# Altium PCB SB2232_v02.PcbDoc
Units mm, origin at the board's own origin, x right, y up, seen from the top; angles counter-clockwise.
Board outline 70 x 25 mm, 2 copper layers (Top Layer, Bottom Layer); 51 components, 50 nets, 185 pads, 116 vias.
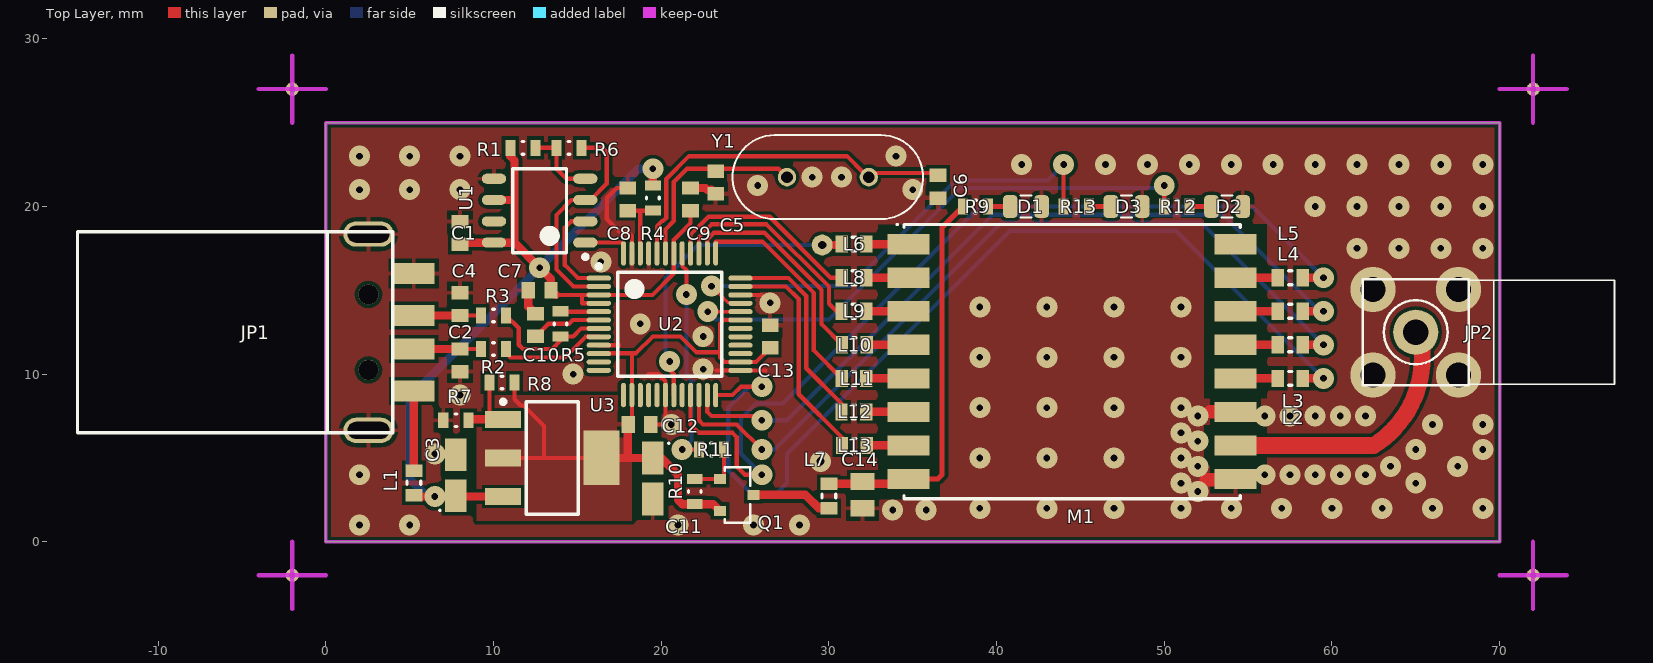
[diagram p0: Top Layer view]
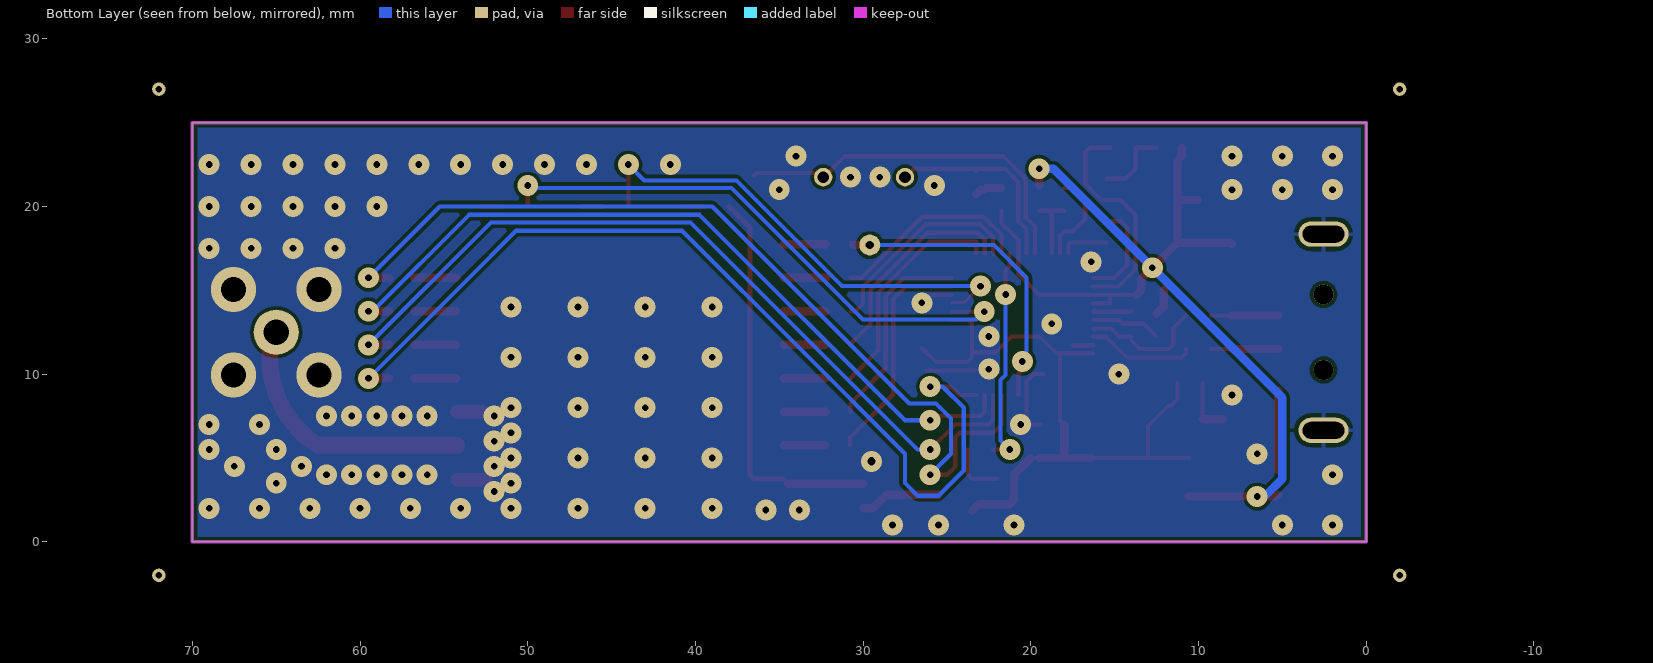
[diagram p1: Bottom Layer view, seen from below]

## Layer stack, top to bottom
Top Solder: solder mask 0.0102, Solder Resist, Dk 3.5
Top Layer: signal copper 0.0356
Dielectric 1: dielectric 0.32, FR-4, Dk 4.8
Bottom Layer: signal copper 0.0356
Bottom Solder: solder mask 0.0102, Solder Resist, Dk 3.5

## Board outline
0,0 0,25 70,25 70,0

## Design rules (kind name [scope] priority, off if disabled: settings)
Clearance Clearance_1 [InNamedPolygon('GND-T1') vs InComponent('M1')] p1: gap=0.6 ignorepadtopadclearanceinfootprint=FALSE
Clearance [All] p2: gap=0.2 ignorepadtopadclearanceinfootprint=FALSE
PolygonConnect PolygonConnect_3 [InComponent('JP2') vs IsNamedPolygon('GND-T1') Or  IsNamedPolygon('GND-B1')] p1: connectstyle=Direct reliefconductorwidth=0.254 reliefentries=4 polygonreliefangle="90 Angle" airgapwidth=0.254
PolygonConnect PolygonConnect_2 [IsVia vs IsNamedPolygon('GND-T1') Or  IsNamedPolygon('GND-B1')] p2: connectstyle=Direct reliefconductorwidth=0.254 reliefentries=4 polygonreliefangle="90 Angle" airgapwidth=0.254
PolygonConnect PolygonConnect_1 [InComponent('U3') vs IsNamedPolygon('3V3_T')] p3: thpad.connectstyle=Direct thpad.reliefconductorwidth=0.254 thpad.reliefentries=4 thpad.polygonreliefangle="90 Angle" thpad.airgapwidth=0.254 smdpad.connectstyle=Direct smdpad.reliefconductorwidth=0.254 smdpad.reliefentries=4 smdpad.polygonreliefangle="90 Angle" smdpad.airgapwidth=0.254 via.connectstyle=Relief via.reliefconductorwidth=0.254 via.reliefentries=4 via.polygonreliefangle="90 Angle" via.airgapwidth=0.254
PolygonConnect [All] p4: connectstyle=Relief reliefconductorwidth=0.254 reliefentries=4 polygonreliefangle="90 Angle" airgapwidth=0.254
RoutingVias [All] p1: holewidth=0.4 width=0.8 viastyle="Through Hole" minholewidth=0.711 minwidth=1.27 maxholewidth=0.711 maxwidth=1.27
SolderMaskExpansion [All] p1: expansion=0.102
Width [All] p1: maxlimit=3 minlimit=0.2 preferedwidth=0.2
30 further rules are at their usual default settings.

## Components (designator, comment, footprint, x,y, rotation, side; value= is the part's Value field where it differs from the comment)
C1 "100n" CAPC1608X08N 8,18.425 r90 top
C2 "47p" CAPC1608X08N 8,10.825 r270 top
C3 "10u 16V" CAPMP3217X18N 7.75,3.975 r90 top
C4 "47p" CAPC1608X08N 8,14.175 r90 top
C5 "47p" CAPC1608X08N 23.25,21.425 r90 top
C6 "47p" CAPC1608X08N 36.5,21.175 r90 top
C7 "100n" CAPC1608X08N 12.75,15 r180 top
C8 "100n" CAPC1608X08N 18,20.425 r90 top
C9 "100n" CAPC1608X08N 21.75,20.425 r90 top
C10 "47n" CAPC1608X08N 12.5,12.925 r270 top
C11 "10u 16V" CAPMP3217X18N 19.5,3.775 r270 top
C12 "100n" CAPC1608X08N 18.7,7 r0 top
C13 "100n" CAPC1608X08N 26.5,12.25 r90 top
C14 "10uF" CAPC2012X11N 32,2.8 r270 top
D1 "LED" LEDC200X125X80L40N 41.75,20 r180 top
D2 "LED" LEDC200X125X80L40N 53.75,20 r180 top
D3 "LED" LEDC200X125X80L40N 47.75,20 r180 top
JP1 "USBA-1M" USB_A_M_SMD 5.24,12.5 r90 top locked
JP2 "S-037" S-037_3D 65,12.5 r0 top
L1 "BLM18AG601" INDC1608X10N 5.25,3.515 r270 top
L2 "BLM18AG601" INDC1608X10N 57.515,9.75 r180 top
L3 "BLM18AG601" INDC1608X10N 57.515,11.75 r180 top
L4 "BLM18AG601" INDC1608X10N 57.515,13.75 r180 top
L5 "BLM18AG601" INDC1608X10N 57.515,15.75 r180 top
L6 "BLM18AG601" INDC1608X10N 31.5,17.75 r0 top
L7 "BLM18AG601" INDC1608X10N 30,2.735 r90 top
L8 "BLM18AG601" INDC1608X10N 31.5,15.75 r180 top
L9 "BLM18AG601" INDC1608X10N 31.485,13.75 r180 top
L10 "BLM18AG601" INDC1608X10N 31.515,11.75 r180 top
L11 "BLM18AG601" INDC1608X10N 31.5,9.75 r180 top
L12 "BLM18AG601" INDC1608X10N 31.485,7.75 r180 top
L13 "BLM18AG601" INDC1608X10N 31.515,5.75 r180 top
M1 "RFM69HW" LGA16_RFM69 44.5,10.75 r0 top locked
Q1 "IRLML6401" SOT-23 23.5,3.75 r270 top
R1 "10k" RESC1608X06N 11.75,23.5 r180 top
R2 "27" RESC1608X06N 10,11.5 r0 top
R3 "27" RESC1608X06N 10,13.5 r0 top
R4 "470" RESC1608X06N 19.5,20.5 r270 top
R5 "1k5" RESC1608X06N 14,13 r270 top
R6 "2k2" RESC1608X06N 14.5,23.5 r0 top
R7 "0" RESC1608X06N 7.75,7.25 r0 top
R8 "nc" RESC1608X06N 10.5,9.5 r0 top
R9 "1k" RESC1608X06N 38.75,20 r0 top
R10 "10k" RESC1608X06N 22,3 r270 top
R11 "1k" RESC1608X06N 23,5.5 r0 top
R12 "1k" RESC1608X06N 50.75,20 r0 top
R13 "1k" RESC1608X06N 44.75,20 r180 top
U1 "93LC46B" SOIC127P600X175-8N 12.75,19.75 r180 top
U2 "FT2232D" TSQFP50P900X900X160-48N 20.5,12.975 r0 top
U3 "LD1117-3.3" SOT230P700X180-4N 13.5,5 r0 top
Y1 "6MHz" XTAL_HC49P488W45L1117T490H350 29.94,21.75 r180 top

## Footprints (in the part's own frame and the unit in brackets; to place one, negate y for a bottom-side part, rotate by r counter-clockwise, add the part's x,y. Pads: shape width x height; smd on the part's side, far side on the other; paste and mask are expansions set on the pad)
CAPC1608X08N [mm] "Chip Capacitor, 2-Leads, Body 1,60x0,80mm, IPC Medium Density"
  rect 0.8x1 smd: 1(-0.675,0) 2(0.675,0)
  body extent -0.87,-0.48 0.87,0.47, height 0.85
CAPC2012X11N [mm] "Chip Capacitor, 2-Leads, Body 2,00x1,25mm, IPC Medium Density"
  rect 1x1.45 smd: 1(-0.8,0) 2(0.8,0)
  body extent -1.1,-0.72 1.1,0.72, height 1.1
CAPMP3217X18N [mm] "Molded Capacitor, 2-Leads, Body 3,20x1,65mm, IPC Medium Density"
  rect 1.95x1.3 smd: 1(1.225,0) 2(-1.225,0)
  silkscreen extent -2.15,0.9 -2.05,1, body extent -1.7,-0.9 1.7,0.9, height 1.8
INDC1608X10N [mm] "Chip Inductor, 2-Leads, Body 1,60x0,80mm, IPC Medium Density"
  rect 0.74x1.02 smd: 1(-0.735,0) 2(0.735,0)
  silkscreen extent -0.1,-0.41 0.1,0.41, body extent -0.9,-0.5 0.9,0.5, height 1
LEDC200X125X80L40N [mm] "LED, Chip; 2.00 mm L X 1.25 mm W X 0.80 mm H body"
  rrect51% 0.86x1.35 smd: A(0.935,0) K(-0.935,0)
  silkscreen extent -0.33,-0.65 0.33,0.65, body extent -1,-0.63 1,0.63, height 0.25
LGA16_RFM69 [mm] "LGA, 16-Leads, RFM69HW"
  rect 2.5x1.2 smd: 1(-9.75,7) 2(-9.75,5) 3(-9.75,3) 4(-9.75,1) 5(-9.75,-1) 6(-9.75,-3) 7(-9.75,-5) 8(-9.75,-7) 9(9.75,-7) 10(9.75,-5) 11(9.75,-3) 12(9.75,-1) 13(9.75,1) 14(9.75,3) 15(9.75,5) 16(9.75,7)
  silkscreen extent -10.47,-8.17 10.02,8.22, body extent -9.87,-8.03 9.87,8.03, height 2
RESC1608X06N [mm] "Chip Resistor, 2-Leads, Body 1,60x0,82mm, IPC Medium Density"
  rect 0.6x0.95 smd: 1(-0.75,0) 2(0.75,0)
  silkscreen extent -0.05,-0.38 0.05,0.38, body extent -0.85,-0.48 0.85,0.48, height 0.6
S-037_3D [mm]
  round 2.7 hole 1.5: 1(0,0) 2(-2.55,-2.55) 2(-2.55,2.55) 2(2.55,-2.55) 2(2.55,2.55)
  silkscreen extent -3.15,-3.15 11.85,3.15, body extent -2.81,-3.4 9.48,2.9, height 11.5
SOIC127P600X175-8N [mm] "SOIC, 8-Leads, Body 4,90x3,90mm, Pitch 1,27mm, IPC Medium Density"
  oval 1.45x0.6 smd: 1(-2.725,1.905) 2(-2.725,0.635) 3(-2.725,-0.635) 4(-2.725,-1.905) 5(2.725,-1.905) 6(2.725,-0.635) 7(2.725,0.635) 8(2.725,1.905)
  silkscreen extent -2.85,-2.5 1.6,2.88, body extent -3,-2.5 3,2.5, height 1.75
SOT230P700X180-4N [mm] "SOT223, 4-Leads, Body 6,50x7,00mm (avg), Pitch 2,30mm, IPC Medium Density"
  rect 2.15x1 smd: 1(-2.925,2.3) 2(-2.925,0) 3(-2.925,-2.3)
  rect 2.15x3.25 smd: 2(2.925,0)
  silkscreen extent -3.05,-3.35 1.55,3.47, body extent -1.85,-3.35 1.85,3.35, height 1.8
SOT-23 [mm]
  rect 0.6x0.7 smd: 1(0,0) 2(0.95,2) 3(1.9,0)
  silkscreen extent -0.7,0.3 2.6,1.8
TSQFP50P900X900X160-48N [mm] "TSQFP, 48-Leads, Body 7,00x7,00mm, Pitch 0,50mm, IPC Medium Density"
  oval 1.45x0.3 smd: 1(-4.225,2.75) 2(-4.225,2.25) 3(-4.225,1.75) 4(-4.225,1.25) 5(-4.225,0.75) 6(-4.225,0.25) 7(-4.225,-0.25) 8(-4.225,-0.75) 9(-4.225,-1.25) 10(-4.225,-1.75) 11(-4.225,-2.25) 12(-4.225,-2.75) 25(4.225,-2.75) 26(4.225,-2.25) 27(4.225,-1.75) 28(4.225,-1.25) 29(4.225,-0.75) 30(4.225,-0.25) 31(4.225,0.25) 32(4.225,0.75) 33(4.225,1.25) 34(4.225,1.75) 35(4.225,2.25) 36(4.225,2.75)
  oval 0.3x1.45 smd: 13(-2.75,-4.225) 14(-2.25,-4.225) 15(-1.75,-4.225) 16(-1.25,-4.225) 17(-0.75,-4.225) 18(-0.25,-4.225) 19(0.25,-4.225) 20(0.75,-4.225) 21(1.25,-4.225) 22(1.75,-4.225) 23(2.25,-4.225) 24(2.75,-4.225) 37(2.75,4.225) 38(2.25,4.225) 39(1.75,4.225) 40(1.25,4.225) 41(0.75,4.225) 42(0.25,4.225) 43(-0.25,4.225) 44(-0.75,4.225) 45(-1.25,4.225) 46(-1.75,4.225) 47(-2.25,4.225) 48(-2.75,4.225)
  silkscreen extent -4.35,-3.1 3.1,3.57, body extent -3.5,-3.5 3.5,3.5, height 1.6
USB_A_M_SMD [mm] "usb male smd mount"
  oval 1.5x3 hole 1 slot 2.5 at 90 deg: 0(-5.85,2.7) 0(5.85,2.7)
  round 1.2 hole 1.2 unplated mask+0: 0(-2.25,2.7) 0(2.25,2.7)
  rect 1.25x2.5 smd: 1(-3.5,0) 2(-1,0) 3(1,0) 4(3.5,0)
  silkscreen extent -6,1.25 6,20.05
XTAL_HC49P488W45L1117T490H350 [mm] "Crystal, HC-49; 4.88 mm C X 0.45 mm W 11.175 mm L X 4.90 mm T X 3.50 mm H body"
  round 1.1 hole 0.7 paste-1.1: 1(-2.44,0) 2(2.44,0)
  silkscreen extent -5.68,-2.5 5.68,2.5, body extent -5.59,-2.45 5.59,2.45, height 3.5

## Part data
C1 C2 C4 C5 C6 C7 C8 C9 C10 C12 C13 C14: library part CAPN, Вид=Конденсатор, Корпус==Footprint
  C1 C7 C8 C9 C12 C13: Тип=100n
  C2 C4 C5 C6: Тип=47p
  C10: Тип=47n
  C14: Тип=10uF
C3 C11: library part CAPP, Вид=Конденсатор, Корпус==Footprint, Тип="10u 16V"
JP1: library part USB_conn, "USB_connector", Вид=Роз'єм, Корпус==Footprint, Тип=USBA-1M
JP2: library part BNC, "RF Connector", Вид=Роз'єм, Корпус==Footprint, Тип=S-037
L1 L2 L3 L4 L5 L6 L7 L8 L9 L10 L11 L12 L13: library part SUPRESOR, Вид="Ferrite bead", Корпус==Footprint, Тип=BLM18AG601
M1: library part RFM69HW_V13_2, Корпус==Footprint, Тип=RFM69HW
Q1: library part MOSF-P, Вид=Транзистор, Корпус==Footprint, Тип=IRLML6401
R1 R2 R3 R4 R5 R6 R7 R8 R9 R10 R11 R12 R13: library part RES, Вид=Резистор, Корпус==Footprint
  R1 R10: Тип=10k
  R2 R3: Тип=27
  R4: Тип=470
  R5: Тип=1k5
  R6: Тип=2k2
  R7: Тип=0
  R8: Тип=nc
  R9 R11 R12 R13: Тип=1k
U1: library part 93C56, "3-wire EEPROM", Вид=Мікросхема, Корпус==Footprint, Тип=93LC46B
U3: library part LM1117_3.3, Вид=Мікросхема, Корпус==Footprint, Тип=LD1117-3.3
Y1: library part Y, Вид=Кварц, Корпус==Footprint, Тип=6MHz
U2: Вид=Мікросхема, Корпус==Footprint, Тип=FT2232D

## Free pads (board coordinates)
  round 1.25 hole 0.5: 2(29.6,17.7)
  round 0.8 hole 0.4: 3(-2,27) 4(72,27) 5(-2,-2) 6(72,-2)

## Via types
v1: diameter 1.25, hole 0.4, Top Layer to Bottom Layer, 115 vias
v2: diameter 1.25, hole 0.5, Top Layer to Bottom Layer, 1 vias

## Nets (pads, with @x,y where several pads share a name; then routed paths per layer and width w, separated by ;. In a path a pad name is that pad's centre, name@x,y a point inside that pad or via, vN(x,y) a via of type N, cw(c..) or ccw(c..) an arc to the next point about the centre after c; other vN are vias at no path point)
+3V3: C11.2 C12.1 C13.1 Q1.3 R8.2 R10.2 U2.10 U2.14 U2.26 U2.31 U3.2 | length 41.6
  Top Layer w0.25: U3.2@10.575,5 13,5 ; R8.2 11.25,8.5 11.625,8.125 11.785,8.125 13,6.91 13,5 ; U2.10 16.3,11.25 18.25,11.25 ; U3.2@16.425,5 13,5 ; C12.1@18,7 18.25,7.25 U2.14 18.25,11.25 ; C11.2 C11.2@20,5 ; U2.31 23.725,13.225 23.5,13 23.5,11.3 ; C13.1 25.65,10.725 U2.26 23.775,10.725 23.5,11 23.5,11.3 ; 18.25,11.25 18.5,11.25 19.5,12.25 21.156,12.25 22.106,11.3 23.5,11.3
  Top Layer w0.5: U3.2@16.425,5 18,5 ; C12.1@18,7 18,5 ; C11.2 18,5 ; C11.2@20,5 21,4 21,2.5 21.25,2.25 R10.2 23.1,2.25 Q1.3
DIO0: L8.2 U2.40 | length 12.1
  Top Layer w0.25: U2.40 21.75,18.321 22.814,19.384 26.473,19.384 30.107,15.75 L8.2
DIO1: L9.2 U2.39 | length 12.5
  Top Layer w0.25: U2.39 22.25,18.184 23,18.934 26.286,18.934 30,15.221 30,14.2 30.45,13.75 L9.2
DIO2: L10.2 U2.38 | length 13
  Top Layer w0.25: U2.38 22.75,18.048 23.136,18.434 26.15,18.434 29.55,15.034 29.55,12.98 L10.2
DIO3: L11.2 U2.37 | length 13.6
  Top Layer w0.25: U2.37 23.25,17.9 26.048,17.9 29.1,14.848 29.1,11.415 L11.2
DIO4: L12.2 U2.36 | length 12.1
  Top Layer w0.25: U2.36 27.586,15.725 28.65,14.661 28.65,10.35 30.75,8.25 L12.2
DIO5: L13.2 U2.35 | length 13.6
  Top Layer w0.25: U2.35 27.45,15.225 28.2,14.475 28.2,8.8 30.78,6.22 L13.2
GND: C1.2 C2.2 C3.1 C4.2 C5.1 C6.1 C7.2 C8.2 C9.2 C10.1 C11.1 C12.2 C13.2 C14.2 D1.K D2.K D3.K JP1.0@2.54,6.65 JP1.0@2.54,18.35 JP1.4 JP2.2 M1.9 M1.11 R7.1 U1.5 U2.9 U2.18 U2.25 U2.34 U2.45 U2.47 | length 22.2
  Top Layer w0.2: 25.975,14.725 26,14.75 ; M1.9@54.2,3.7 M1.9
  Top Layer w0.25: U2.9 17.475,11.725 ; C8.2 17.35,21.1 16.75,20.5 16.75,19.25 17.5,18.5 18,18.5 18.25,18.25 U2.47 ; 19.25,10 19.825,10 20.25,9.575 U2.18 20.25,7 C12.2 ; C5.1@22.75,21 C5.1@23,21 ; 23.3,10.225 U2.25 26.225,10.225 ; U2.34 25.975,14.725
  Top Layer w0.5: C7.2 12.075,14.025 C10.1 ; C9.2 22.65,21.1 C5.1@22.75,21 ; C5.1@23,21 C5.1
  Top Layer w0.8: 52.5,3.7 M1.9@54.2,3.7 ; 52.746,7.75 M1.11
  other v1: 2,1 5,1 21,1 25.5,1 28.25,1 33.8,1.9 35.8,1.9 39,2 43,2 47,2 51,2 54,2 57,2 60,2 63,2 66,2 69,2 52,3 51,3.5 65,3.5 2,4 56,4 57.5,4 59,4 60.5,4 62,4 52,4.5 63.5,4.5 67.5,4.5 39,5 43,5 47,5 51,5 6.5,5.25 65,5.5 69,5.5 52,6 51,6.5 20.6,7 66,7 69,7 52,7.5 56,7.5 57.5,7.5 59,7.5 60.5,7.5 62,7.5 39,8 43,8 47,8 51,8 8,8.75 14.75,10 22.5,10.3 39,11 43,11 47,11 51,11 22.5,12.25 18.75,13 39,14 43,14 47,14 51,14 26.5,14.25 16.4,16.7 61.5,17.5 64,17.5 66.5,17.5 69,17.5 59,20 61.5,20 64,20 66.5,20 69,20 2,21 5,21 8,21 35,21 25.75,21.25 29,21.75 30.75,21.75 41.5,22.5 46.5,22.5 49,22.5 51.5,22.5 54,22.5 56.5,22.5 59,22.5 61.5,22.5 64,22.5 66.5,22.5 69,22.5 2,23 5,23 8,23 34,23
  other v2: 29.5,4.8
LED1: R13.2 U2.33 | length 28.7
  Top Layer w0.2: v1(23,15.25) 23.7,14.55 23.7,14.539 23.964,14.275 24.725,14.275 U2.33
  Top Layer w0.25: R13.2 v1(44,22.5)
  Bottom Layer w0.25: v1(23,15.25) 31.25,15.25 37.55,21.55 43.05,21.55 v1(44,22.5)
LED2: R12.1 U2.32 | length 33.9
  Top Layer w0.2: v1(22.775,13.725) U2.32
  Top Layer w0.25: R12.1 v1(50,21.25)
  Bottom Layer w0.25: v1(22.775,13.725) 23.25,13.25 30,13.25 37.85,21.1 49.85,21.1 v1(50,21.25)
MISO: L3.1 U2.22 | length 49.7
  Top Layer w0.25: U2.22 22.25,7.25 22.5,7 24.5,7 v1(26,5.5)
  Top Layer w0.5: L3.1 v1(59.5,11.75)
  Bottom Layer w0.25: v1(26,5.5) 26,5.75 26.25,5.5 26.75,5.5 40.302,19.052 52.198,19.052 v1(59.5,11.75)
MOSI: L4.1 U2.23 | length 46.7
  Top Layer w0.25: U2.23 22.75,7.75 23,7.5 25.5,7.5 25.75,7.25 v1(26,7.25)
  Top Layer w0.5: L4.1 v1(59.5,13.75)
  Bottom Layer w0.25: v1(26,7.25) 27.5,7.25 39.752,19.502 53.498,19.502 59.25,13.75 v1(59.5,13.75)
NCS: L5.1 U2.21 | length 55.1
  Top Layer w0.25: U2.21 21.75,7 22.25,6.5 24.25,6.5 24.5,6.25 24.5,4.5 25,4 v1(26,4)
  Top Layer w0.5: L5.1 v1(59.5,15.75)
  Bottom Layer w0.25: v1(26,4) 24.75,5.25 24.75,7.344 25.656,8.25 27.25,8.25 39,20 55.25,20 v1(59.5,15.75)
NetC2_1: C2.1 JP1.2 R2.1 | length 4
  Top Layer w0.25: C2.1 R2.1
  Top Layer w0.5: JP1.2 C2.1
NetC4_1: C4.1 JP1.3 R3.1 | length 4
  Top Layer w0.25: C4.1 R3.1
  Top Layer w0.5: JP1.3 C4.1
NetC5_2: C5.2 U2.43 Y1.2 | length 12
  Top Layer w0.25: U2.43 20.25,18.629 20.75,19.129 20.75,21.46 21.54,22.25 C5.2@23.25,22.25 ; C5.2 C5.2@23.25,22.25 ; Y1.2@27.375,21.625 27.375,21.875 27,22.25 C5.2@23.25,22.25
NetC6_2: C6.2 U2.44 Y1.1 | length 21.9
  Top Layer w0.25: U2.44 19.75,18.821 20.054,19.125 20.11,19.125 20.3,19.315 20.3,21.646 21.654,23 31.08,23 32.08,22 36.35,22 C6.2
NetC8_1: C8.1 R4.2 U2.46 | length 4
  Top Layer w0.25: C8.1 18.75,19.75 ; U2.46 18.75,19.75 ; R4.2 18.75,19.75
NetC10_2: C10.2 U2.6 | length 4.2
  Top Layer w0.25: C10.2 12.51,12.25 13.26,13 14.5,13 14.725,13.225 U2.6
NetD1_A: D1.A R9.2 | length 1.3
  Top Layer w0.3: R9.2 D1.A
NetD2_A: D2.A R12.2 | length 1.3
  Top Layer w0.3: R12.2 D2.A
NetD3_A: D3.A R13.1 | length 1.3
  Top Layer w0.3: R13.1 D3.A
NetJP1_1: JP1.1 L1.1 | length 4.8
  Top Layer w0.25: L1.1@5.24,4.26 L1.1
  Top Layer w0.5: L1.1@5.24,4.26 JP1.1
NetJP2_1: JP2.1 M1.10 | length 15.8
  Top Layer w1: M1.10 62.5,5.75 ccw(c59.21,10.974) JP2.1@65.25,12.25
NetL2_2: L2.2 M1.12 | length 2.5
  Top Layer w0.5: M1.12 L2.2
NetL3_2: L3.2 M1.13 | length 2.5
  Top Layer w0.5: M1.13 L3.2
NetL4_2: L4.2 M1.14 | length 2.5
  Top Layer w0.5: M1.14 L4.2
NetL5_2: L5.2 M1.15 | length 2.5
  Top Layer w0.5: M1.15 L5.2
NetL6_2: L6.2 M1.1 | length 2.5
  Top Layer w0.5: L6.2 M1.1
NetL7_1: L7.1 Q1.2 | length 4.8
  Top Layer w0.5: Q1.2 28.6,2.8 29.4,2 L7.1
NetL8_1: L8.1 M1.2 | length 2.5
  Top Layer w0.5: L8.1 M1.2
NetL9_1: L9.1 M1.3 | length 2.5
  Top Layer w0.5: L9.1 M1.3
NetL10_1: L10.1 M1.4 | length 2.5
  Top Layer w0.5: L10.1 M1.4
NetL11_1: L11.1 M1.5 | length 2.5
  Top Layer w0.5: L11.1 M1.5
NetL12_1: L12.1 M1.6 | length 2.5
  Top Layer w0.5: L12.1 M1.6
NetL13_1: L13.1 M1.7 | length 2.5
  Top Layer w0.5: L13.1 M1.7
NetQ1_1: Q1.1 R10.1 R11.2 | length 3.4
  Top Layer w0.25: R10.1 Q1.1 23.75,4 R11.2
NetR1_1: R1.1 R6.1 U1.4 | length 4.5
  Top Layer w0.25: R1.1 R6.1 13.75,22.25 14.345,21.655 U1.4
NetR2_2: R2.2 U2.8 | length 6.4
  Top Layer w0.25: R2.2 10.75,11.25 11,11 14.25,11 15.475,12.225 U2.8
NetR3_2: R3.2 R5.2 U2.7 | length 7.3
  Top Layer w0.25: R3.2 11.5,12.75 11.5,11.75 11.75,11.5 13.5,11.5 R5.2@14,12 ; R5.2 14.75,12.25 15.225,12.725 U2.7
NetR5_1: R5.1 U2.5 | length 2.3
  Top Layer w0.25: R5.1 14.025,13.725 U2.5
NetR6_2: R6.2 U1.3 U2.2 | length 13.5
  Top Layer w0.25: R6.2 16.5,23.5 16.75,23.25 16.75,21.359 15.776,20.385 U1.3 14.635,20.385 13.75,19.5 13.75,16.25 14.775,15.225 U2.2
NetR7_2: R7.2 R8.1 U3.1 | length 3.5
  Top Layer w0.25: R7.2 R7.2@8.55,7.3 ; U3.1@9.75,7.3 R8.1
  Top Layer w0.5: R7.2@8.55,7.3 U3.1@9.75,7.3
NetU1_1: U1.1 U2.48 | length 2.9
  Top Layer w0.25: U1.1 17.655,17.845 17.75,17.75 U2.48
NetU1_2: U1.2 U2.1 | length 6
  Top Layer w0.25: U1.2 14.615,19.115 14.25,18.75 14.25,16.5 15.025,15.725 U2.1
P\W\R\: R11.1 U2.41 | length 13.2
  Top Layer w0.25: v1(21.25,5.5) R11.1 ; U2.41 21.275,17.175 21.275,16.428 21.5,16.203 v1(21.5,14.75)
  Bottom Layer w0.25: v1(21.25,5.5) 21.8,6.05 21.8,9.656 21.5,9.957 v1(21.5,14.75)
RFRST: L6.1 pad.2 U2.19 | length 18.9
  Top Layer w0.2: L6.1@30.6,17.7 L6.1@30.772,17.872
  Top Layer w0.25: v1(20.5,10.75) 20.5,10.25 20.75,10 U2.19 ; pad.2 pad.2@29.854,17.926
  Top Layer w0.5: pad.2 L6.1@30.6,17.7
  Bottom Layer w0.25: v1(20.5,10.75) 20.25,11 20.25,15.75 22.2,17.7 pad.2
SCK: L2.1 U2.24 | length 57.8
  Top Layer w0.25: U2.24 24.25,8.75 24.75,9.25 v1(26,9.25)
  Top Layer w0.5: L2.1 v1(59.5,9.75)
  Bottom Layer w0.25: v1(26,9.25) 25.25,9.25 24,8 24,4.25 25.5,2.75 26.75,2.75 27.5,3.5 27.5,5.25 33.5,11.25 40.8,18.55 50.7,18.55 53.75,15.5 v1(59.5,9.75)
V_BUS: C1.1 C3.2 C7.1 C9.1 L1.2 R1.2 R4.1 U1.6 U1.8 U2.3 U2.4 U2.42 U3.3 | length 61
  Top Layer w0.25: C7.1@13.7,14.725 15.275,14.725 ; U2.4 15.275,14.225 15.275,14.725 ; C9.1 21.75,19 20.75,18 U2.42 20.75,16 19.475,14.725 U2.3 15.275,14.725
  Top Layer w0.5: L1.2 5.33,2.7 v1(6.5,2.7) U3.3 ; C1.1 8.095,17.845 U1.8 11.25,17.845 ; U1.6 11.135,20.385 11.25,20.5 ; R1.2 11,23 11.25,22.75 11.25,20.5 ; C7.1@13.7,14.725 C7.1 13.4,15.025 13.4,15.695 v1(12.75,16.345) 11.25,17.845 ; R4.1 v1(19.5,22.25) ; 11.25,17.845 11.25,20.5
  Bottom Layer w0.5: v1(6.5,2.7) 6.05,2.7 5,3.75 5,8.595 v1(12.75,16.345) 18.655,22.25 v1(19.5,22.25)
V_RF: C14.1 L7.2 M1.8 R9.1 | length 23.5
  Top Layer w0.25: M1.8@34.47,3.47 M1.8
  Top Layer w0.3: M1.8 36.5,3.75 36.75,4 36.75,18.75 R9.1
  Top Layer w0.5: L7.2 M1.8@34.47,3.47
pads on no net: JP1.0@2.54,10.25 JP1.0@2.54,14.75 M1.16 U1.7 U2.11 U2.12 U2.13 U2.15 U2.16 U2.17 U2.20 U2.27 U2.28 U2.29 U2.30

## Polygon pours and split planes (outlines as drawn)
GND on Top Layer "GND-T1" (solid, remove dead copper, pour order 2): 0.227,-0.019 70.227,-0.019 70.227,24.981 0.227,24.981
+3V3 on Top Layer "3V3_T" (solid, remove dead copper, pour order 0): 9,8.75 9,1.25 18.25,1.25 18.25,8.75
GND on Bottom Layer "GND-B1" (solid, remove dead copper, pour order 4): 0,0 70,0 70,25 0,25

## Keep-outs
Top Layer:
  lines w0.254: -4,-2 0,-2 ; -4,27 0,27 ; -2,-4 -2,0 ; -2,25 -2,29 ; 70,-2 74,-2 ; 70,27 74,27 ; 72,-4 72,0 ; 72,25 72,29
Keep-Out Layer:
  the board outline again, w0.2

## Silkscreen, mask and mechanical layers (free items; w line width, h text height)
Top Solder:
  text "USB RF adapter v1.1 (c) Harbinger 2018" at 38.3,23.6 h0.8

## Dimensions
0,0 to 0,25 on Mechanical 1
0,0 to 70,0 on Mechanical 1